# Altium PCB Sample_FPC_FFC_TestBoard_Flipped_v1.PcbDoc
Units mil, origin at the board's own origin, x right, y up, seen from the top; angles counter-clockwise.
Board outline 1114.96 x 1114.96 mil, 2 copper layers (Top Layer, Bottom Layer); 5 components, 10 nets, 31 pads, 0 vias.
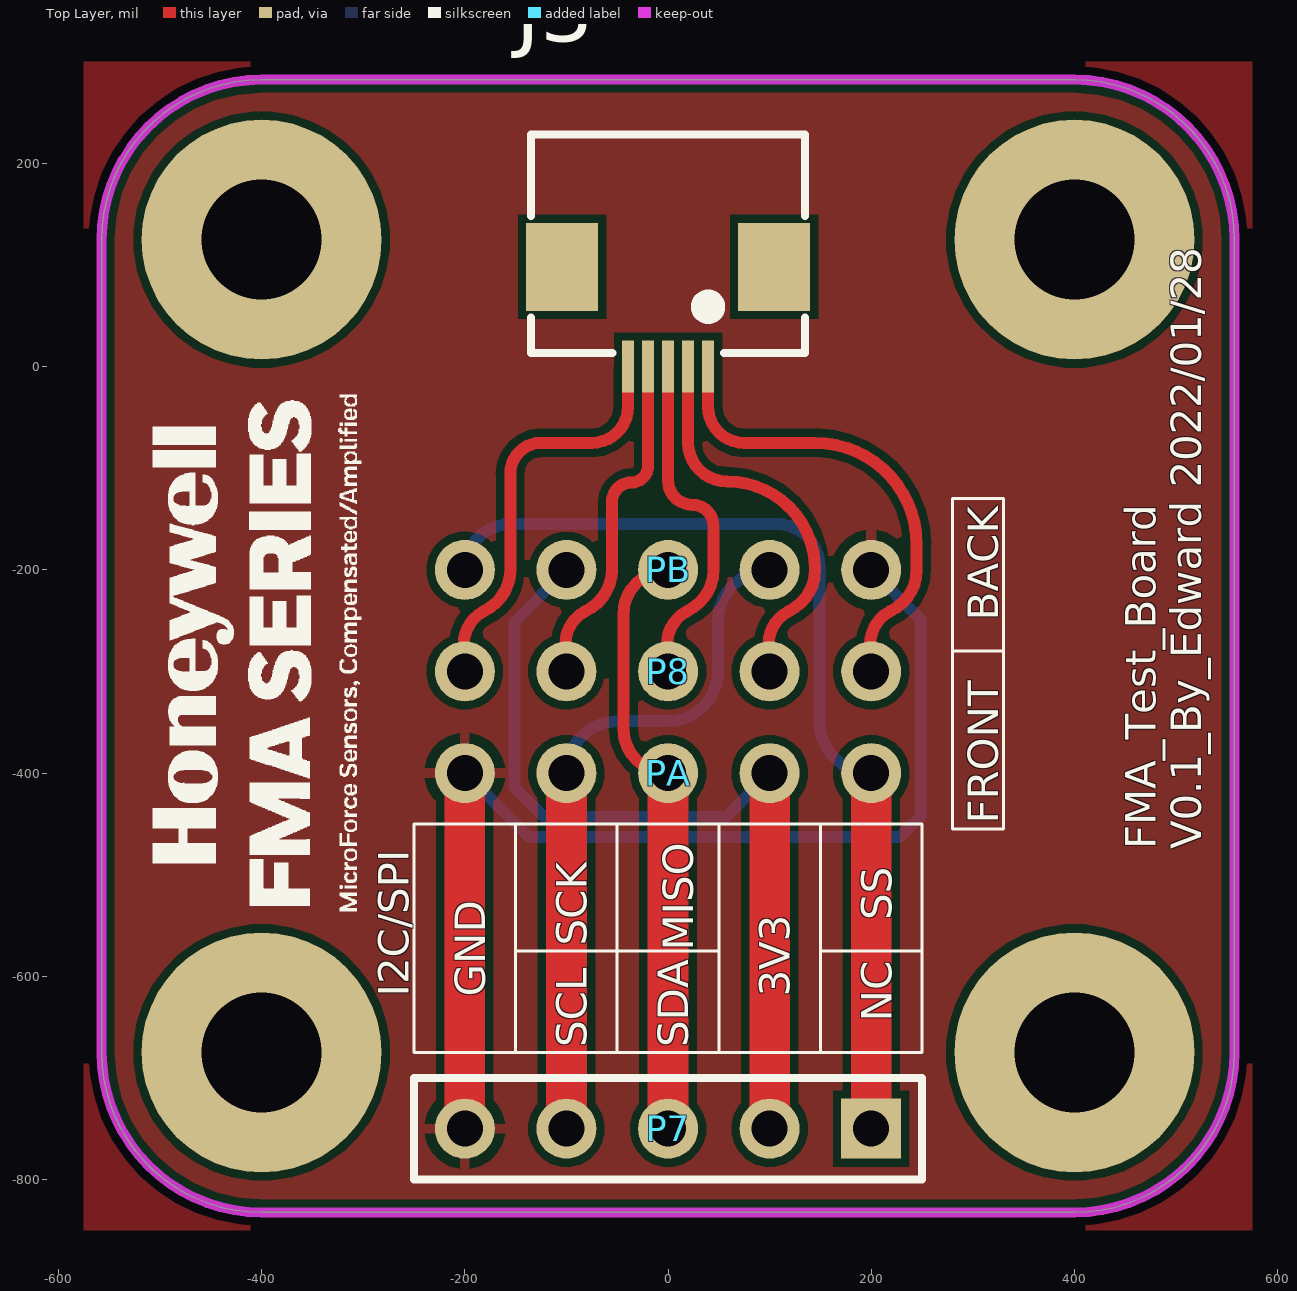
[diagram p0: Top Layer view]
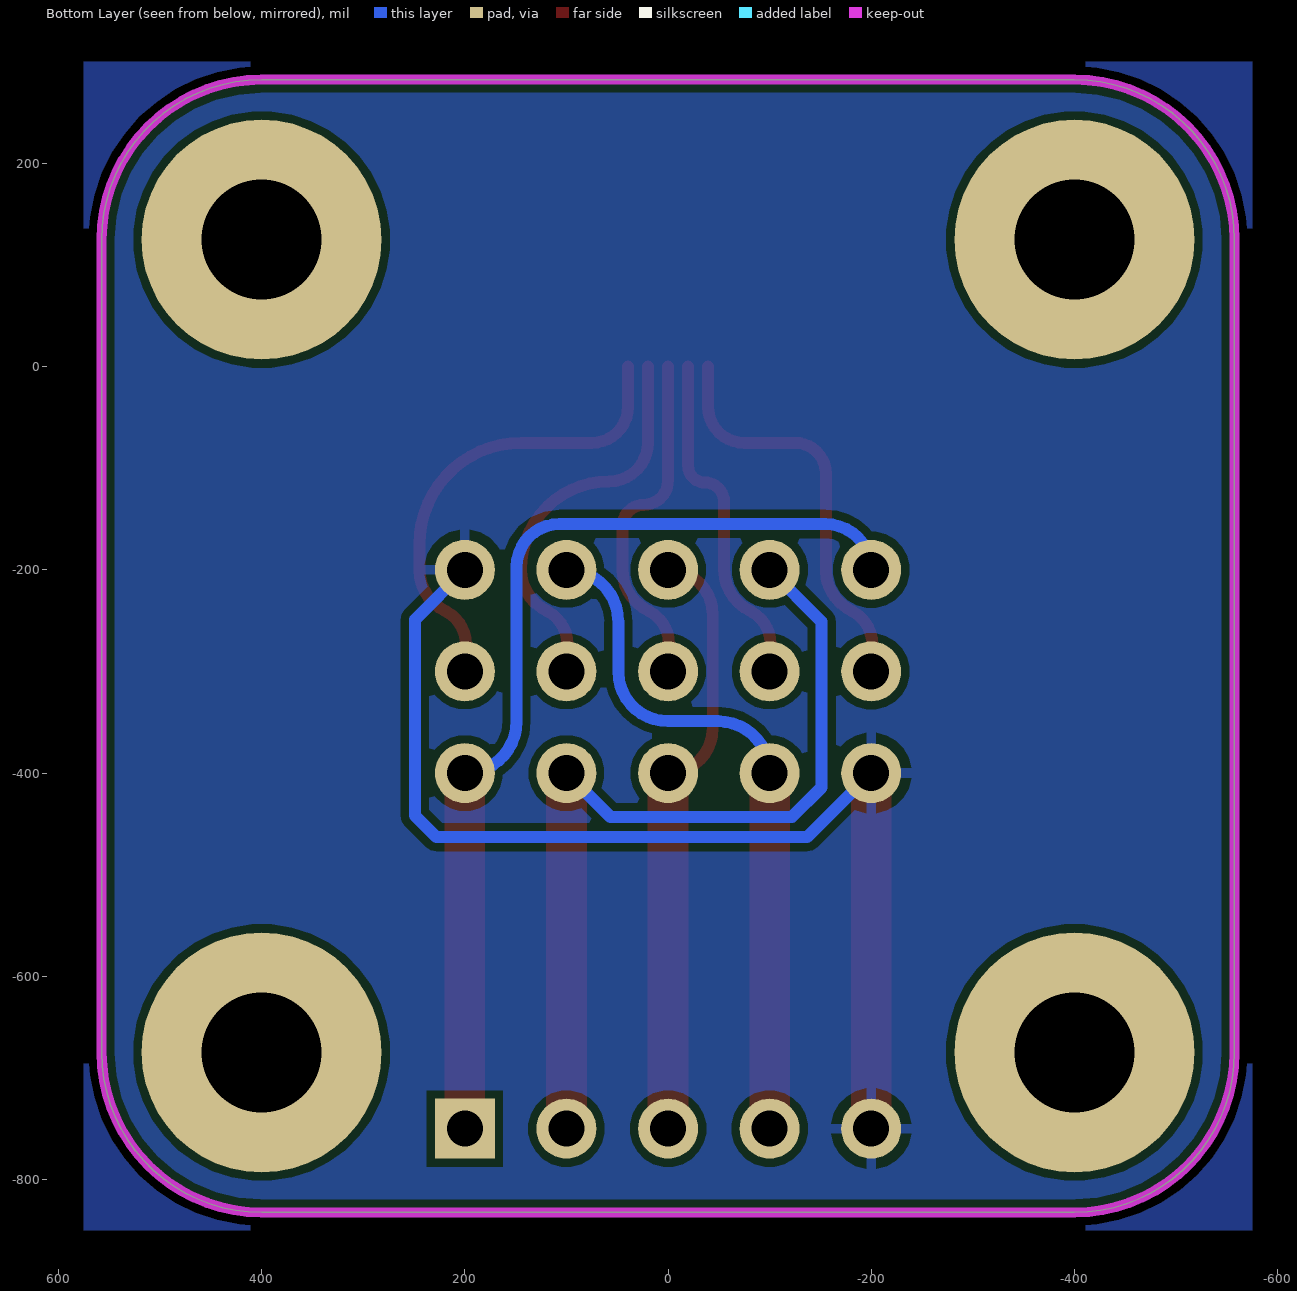
[diagram p1: Bottom Layer view, seen from below]

## Layer stack, top to bottom
Top Solder: solder mask 0.4, Solder Resist, Dk 3.5
Top Layer: signal copper 1.4
Dielectric 1: dielectric 12.6, FR-4, Dk 4.8
Bottom Layer: signal copper 1.4
Bottom Solder: solder mask 0.4, Solder Resist, Dk 3.5

## Board outline
-557.48,-675 ccw(c-400,-675) -400,-832.48 400,-832.48 ccw(c400,-675) 557.48,-675 557.48,125 ccw(c400,125) 400,282.48 -400,282.48 ccw(c-400,125) -557.48,125

## Design rules (kind name [scope] priority, off if disabled: settings)
Clearance [All] p1: gap=7.87 ignorepadtopadclearanceinfootprint=FALSE
HoleSize [All] p1 off: absolutevalues=TRUE maxlimit=100 minlimit=1 maxpercent=80.000 minpercent=20.000
HoleToHoleClearance [All] p1 off: gap=10 allowstackedmicrovias=TRUE
LayerPairs [All] p1 off: enforce=TRUE
MinimumSolderMaskSliver [All] p1 off: minsoldermaskwidth=10
NetAntennae [All] p1 off: netantennaetolerance=0
PolygonConnect [All] p1: connectstyle=Relief reliefconductorwidth=10 reliefentries=4 polygonreliefangle="90 Angle" airgapwidth=10
RoutingVias [All] p1: holewidth=7.87 width=15.75 viastyle="Through Hole" minholewidth=7.87 minwidth=15.75 maxholewidth=28 maxwidth=50
SilkToSilkClearance [All] p1 off: silktosilkclearance=10
SolderMaskExpansion [All] p1: expansion=4 istentingtop=FALSE
Width [All] p1: maxlimit=40 minlimit=11.81 preferedwidth=11.81 minimp=50.000000 maximp=50.000000 favimp=50.000000
24 further rules are at their usual default settings.

## Components (designator, comment, footprint, x,y, rotation, side; value= is the part's Value field where it differs from the comment)
J3 "FPC0.5-5P" FPC0.5-5P 0,98.31 r180 top
P7 "Header 5" HDR1X5 200,-750 r180 top
P8 "Header 5" HDR1X5-2 200,-300 r180 top
PA "Header 5" HDR1X5-2 200,-400 r180 top
PB "Header 5" HDR1X5-2 200,-200 r180 top

## Footprints (in the part's own frame and the unit in brackets; to place one, negate y for a bottom-side part, rotate by r counter-clockwise, add the part's x,y. Pads: shape width x height; smd on the part's side, far side on the other; paste and mask are expansions set on the pad)
FPC0.5-5P [mm]
  rect 1.8x2.2 smd: 0(-2.65,0) 0(2.65,0)
  rect 0.3x1.3 smd: 1(-1,2.497) 2(-0.5,2.497) 3(0,2.497) 4(0.5,2.497) 5(1,2.497)
  silkscreen extent -3.42,-3.3 3.42,2.16, body extent -3.35,-3.15 3.35,2.85, height 2
HDR1X5 [mm] "Connector; Header; 4 Position"
  rect 1.5x1.5 hole 0.9: 1(0,0)
  round 1.5 hole 0.9: 2(2.54,0) 3(5.08,0) 4(7.62,0) 5(10.16,0)
  silkscreen extent -1.27,-1.27 11.43,1.27
HDR1X5-2 [mm] "Connector; Header; 4 Position"
  round 1.5 hole 0.9: 1(0,0) 2(2.54,0) 3(5.08,0) 4(7.62,0) 5(10.16,0)

## Part data
P7 P8 PA PB: "Header, 4-Pin", LatestRevisionDate=17-Jul-2002, LatestRevisionNote="Re-released for DXP Platform.", Publisher="Altium Limited"

## Free pads (board coordinates)
  round 236.22 hole 118.11 unplated: NC(-400,-675) NC(-400,125) NC(400,-675) NC(400,125)

## Nets (pads, with @x,y where several pads share a name; then routed paths per layer and width w, separated by ;. In a path a pad name is that pad's centre, name@x,y a point inside that pad or via, vN(x,y) a via of type N, cw(c..) or ccw(c..) an arc to the next point about the centre after c; other vN are vias at no path point)
GND: P7.5 PA.5 PB.1 | length 1096.1
  Top Layer w40: P7.5 PA.5
  Bottom Layer w11.81: PA.5 -137,-463 228,-463 249,-442 249,-249 PB.1
MISO: P7.3 PA.3 PB.3 | length 600.2
  Top Layer w11.81: PA.3 cw(c0,-356) -44,-356 -44,-244 cw(c0,-244) PB.3
  Top Layer w40: P7.3 PA.3
PIN1: J3.1 P8.1 | length 436.6
  Top Layer w11.81: J3.1 39.37,-39.37 ccw(c75,-39.37) 75,-75 144.73,-75 cw(c144.73,-175) 244.73,-175 244.73,-200 cw(c200,-200) 218.91,-240.54 ; P8.1@199,-273.29 cw(c235.94,-273.29) 217.47,-241.3
PIN2: J3.2 P8.2 | length 360.8
  Top Layer w11.81: J3.2 19.68,-74.64 ccw(c58.04,-74.64) 58.04,-113 cw(c58.04,-199.69) 144.73,-199.69 144.73,-200 cw(c100,-200) 118.91,-240.54 ; P8.2@99,-273.29 cw(c135.94,-273.29) 117.47,-241.3
PIN3: J3.3 P8.3 | length 316.9
  Top Layer w11.81: P8.3@-1,-273.29 cw(c35.94,-273.29) 17.47,-241.3 ; J3.3 0,-112 ccw(c24,-112) 24,-136 cw(c24,-156.72) 44.72,-156.72 44.72,-199.01 ; 18.91,-240.54 ccw(c0,-200) 44.72,-200.99 ; 44.72,-200.99 ccw(c0,-200) 44.72,-199.01 ; 44.72,-200.99 44.72,-199.01
PIN4: J3.4 P8.4 | length 309.7
  Top Layer w11.81: P8.4@-101,-273.29 cw(c-64.06,-273.29) -82.53,-241.3 ; -81.09,-240.54 ccw(c-100,-200) -55.27,-200 -55.27,-133.27 cw(c-36,-133.27) -36,-114 ccw(c-36,-97.69) -19.69,-97.69 J3.4
PIN5: J3.5 P8.5 | length 379
  Top Layer w11.81: P8.5@-201,-273.29 cw(c-164.06,-273.29) -182.53,-241.3 ; -181.09,-240.54 ccw(c-200,-200) -155.28,-200.99 ; J3.5 -39.37,-39.37 cw(c-75,-39.37) -75,-75 -125,-75 ccw(c-125,-105.28) -155.28,-105.28 -155.28,-199.01 ; -155.28,-200.99 ccw(c-200,-200) -155.28,-199.01 ; -155.28,-200.99 -155.28,-199.01
SCLK: P7.4 PA.4 PB.2 | length 685.2
  Top Layer w40: P7.4 PA.4
  Bottom Layer w11.81: PA.4 cw(c-49,-400) -49,-349 0,-349 ccw(c0,-300) 49,-300 49,-251 cw(c100,-251) PB.2
SS: P7.1 PA.1 PB.5 | length 980.8
  Top Layer w40: P7.1 PA.1
  Bottom Layer w11.81: PB.5 cw(c-155,-200) -155,-155 107,-155 cw(c107,-197) 149,-197 149,-349 ccw(c200,-349) PA.1
VCC: P7.2 PA.2 PB.4 | length 866.3
  Top Layer w40: P7.2 PA.2
  Bottom Layer w11.81: PB.4 -151,-251 -151,-414.24 -121.94,-443.31 56.69,-443.31 PA.2
pads on no net: J3.0

## Polygon pours and split planes (outlines as drawn)
GND on Top Layer "GND_L01_P000" (solid, pour order 0): -575,300 575,300 575,-850 -575,-850
GND on Bottom Layer "GND_L02_P002" (solid, pour order 2): -575,300 575,300 575,-850 -575,-850

## Keep-outs
Keep-Out Layer:
  the board outline again, w10

## Silkscreen, mask and mechanical layers (free items; w line width, h text height)
Top Overlay:
  drawing of 74 lines, arcs and shapes, not listed
  text "BACK" at 325,-250 h30 r90
  text "FRONT" at 325,-450 h30 r90
  text "FMA_Test_Board / V0.1_By_Edward 2022/01/28" at 525,-475 h30 r90
  text "SS" at 220,-545 h30 r90
  text "SCK" at -80,-570 h30 r90
  text "MISO" at 25,-575 h30 r90
  text "I2C/SPI" at -255,-620 h30 r90
  text "GND" at -180,-620 h30 r90
  text "3V3" at 120,-620 h30 r90
  text "NC" at 220,-645 h30 r90
  text "SCL" at -80,-670 h30 r90
  text "SDA" at 20,-670 h30 r90